# Altium PCB PCB1.PcbDoc
Units mil, origin at the board's own origin, x right, y up, seen from the top; angles counter-clockwise.
Board outline 3937.01 x 3937.01 mil, 2 copper layers (Top Layer, Bottom Layer); 288 components, 235 nets, 1002 pads, 0 vias.
Unrouted connection lines stored in the file: 724.
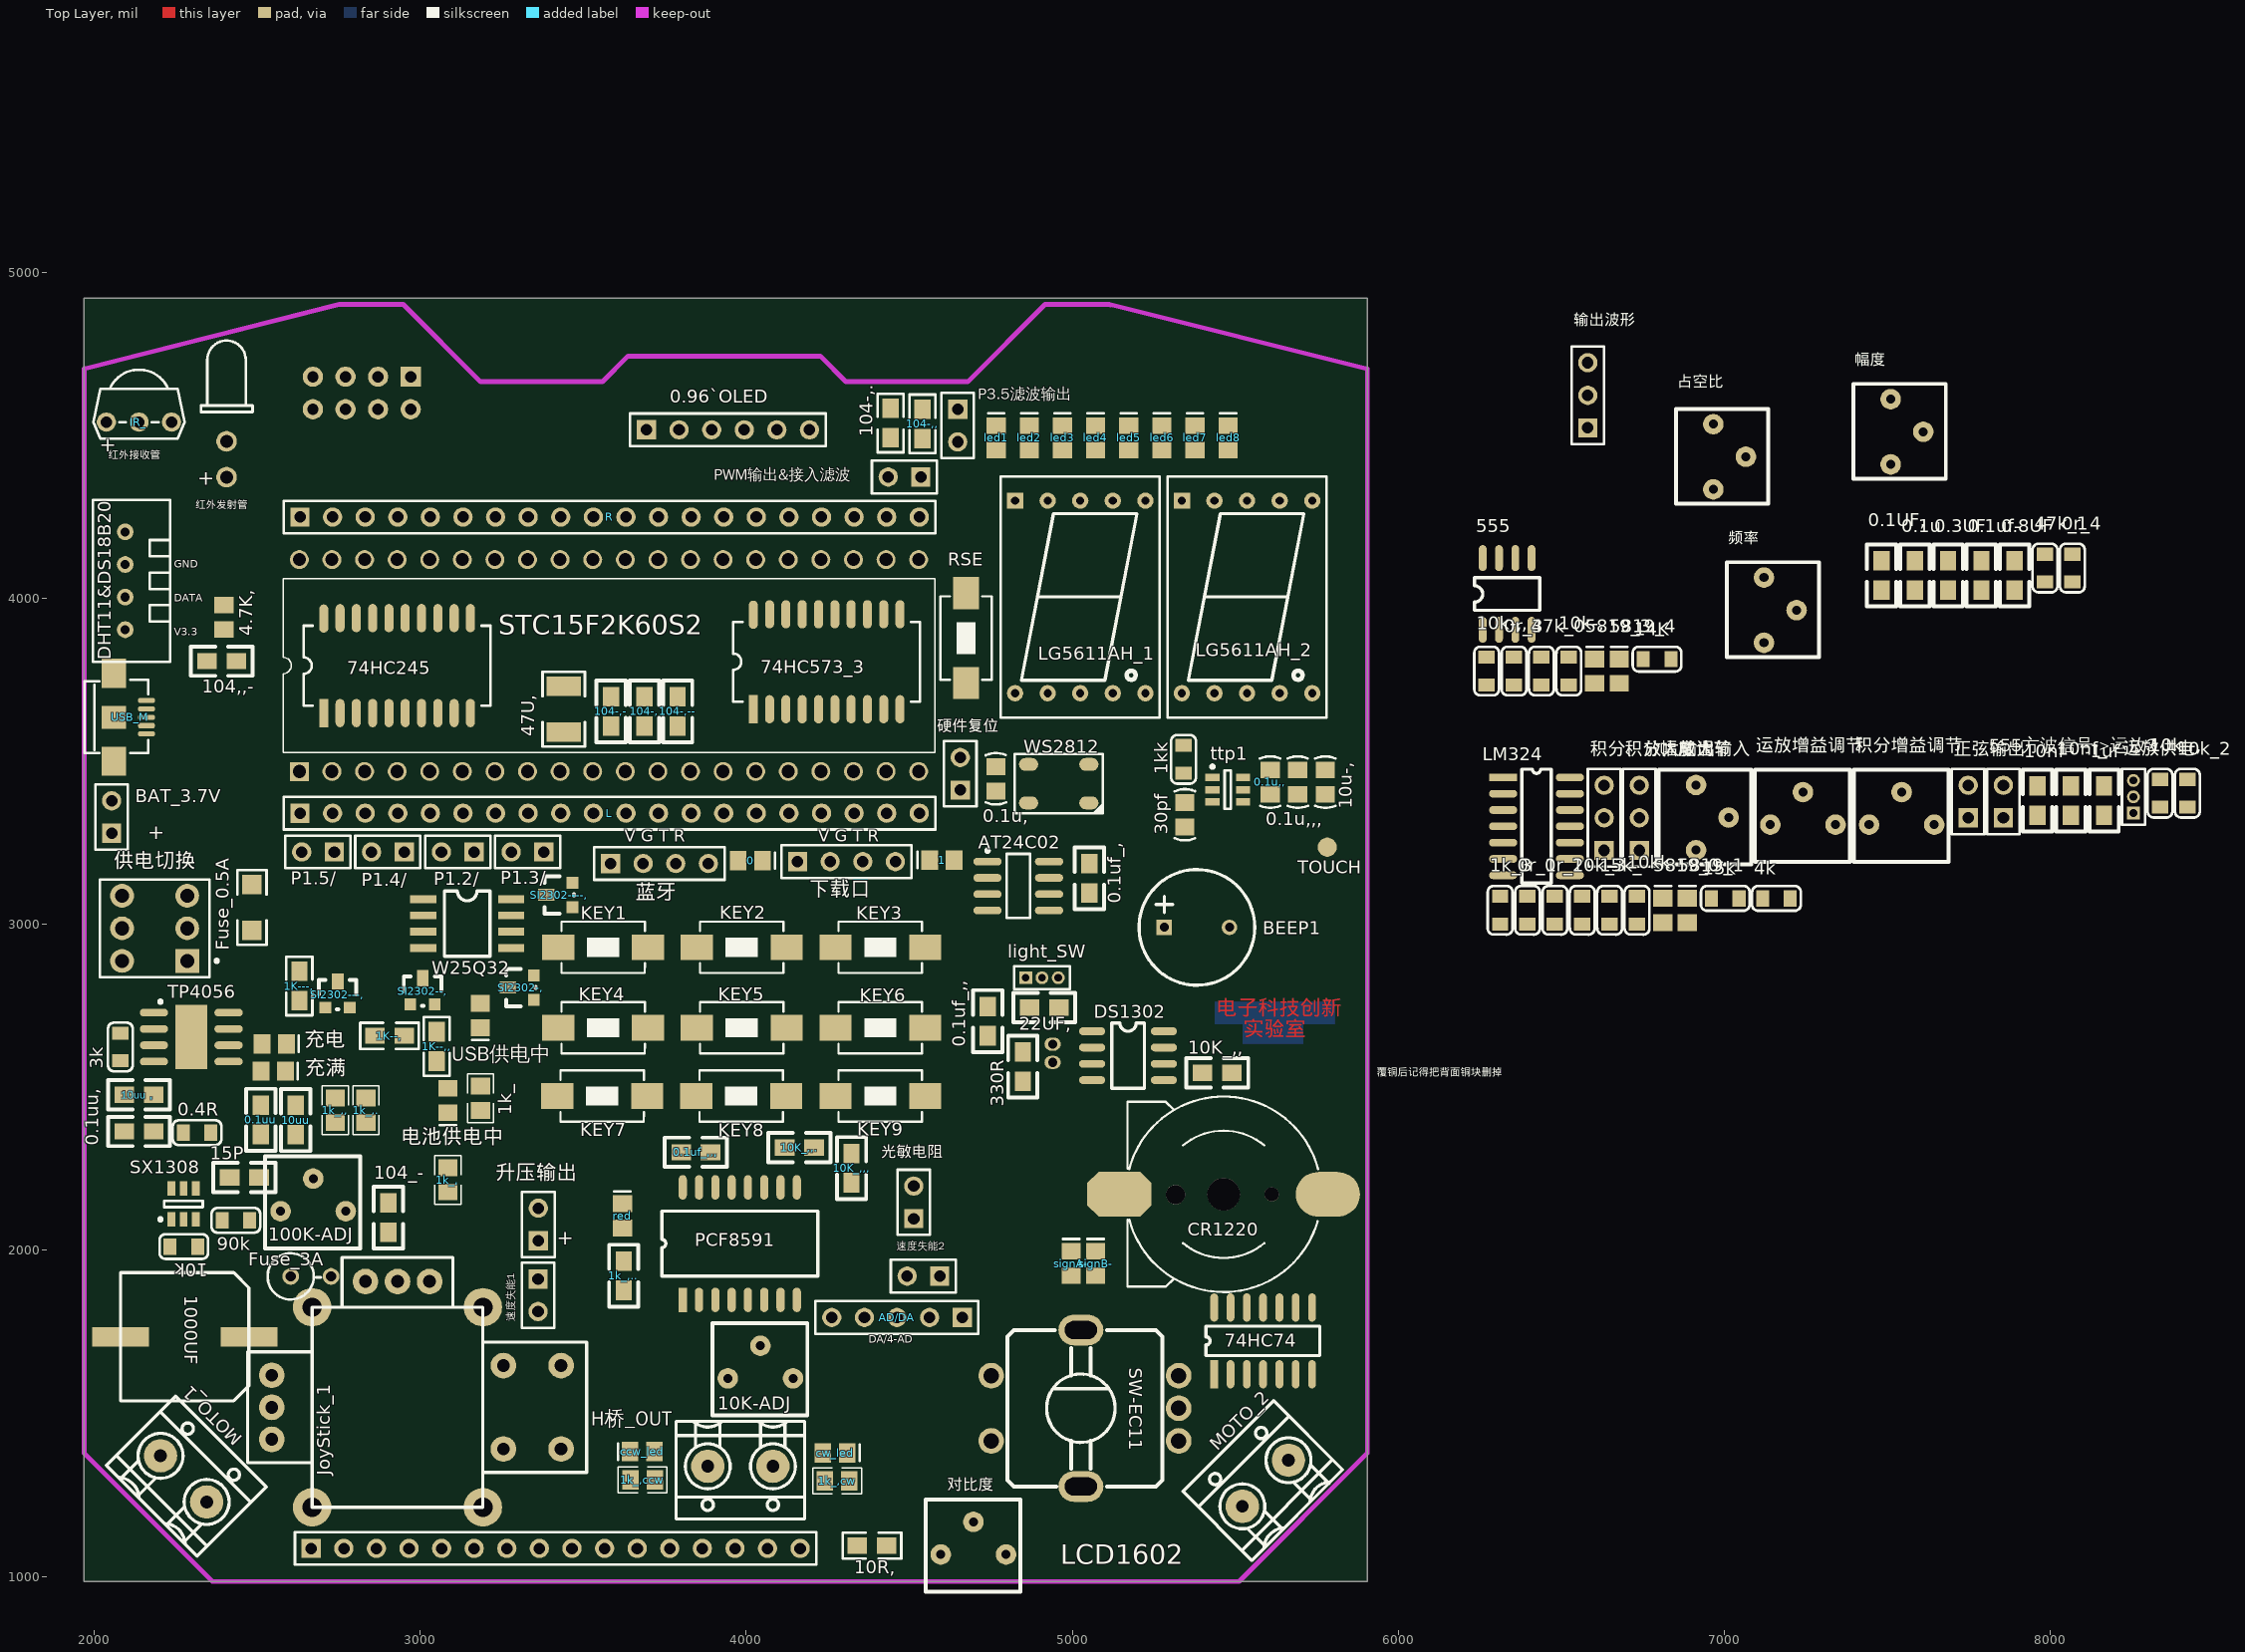
[diagram p0: Top Layer view]
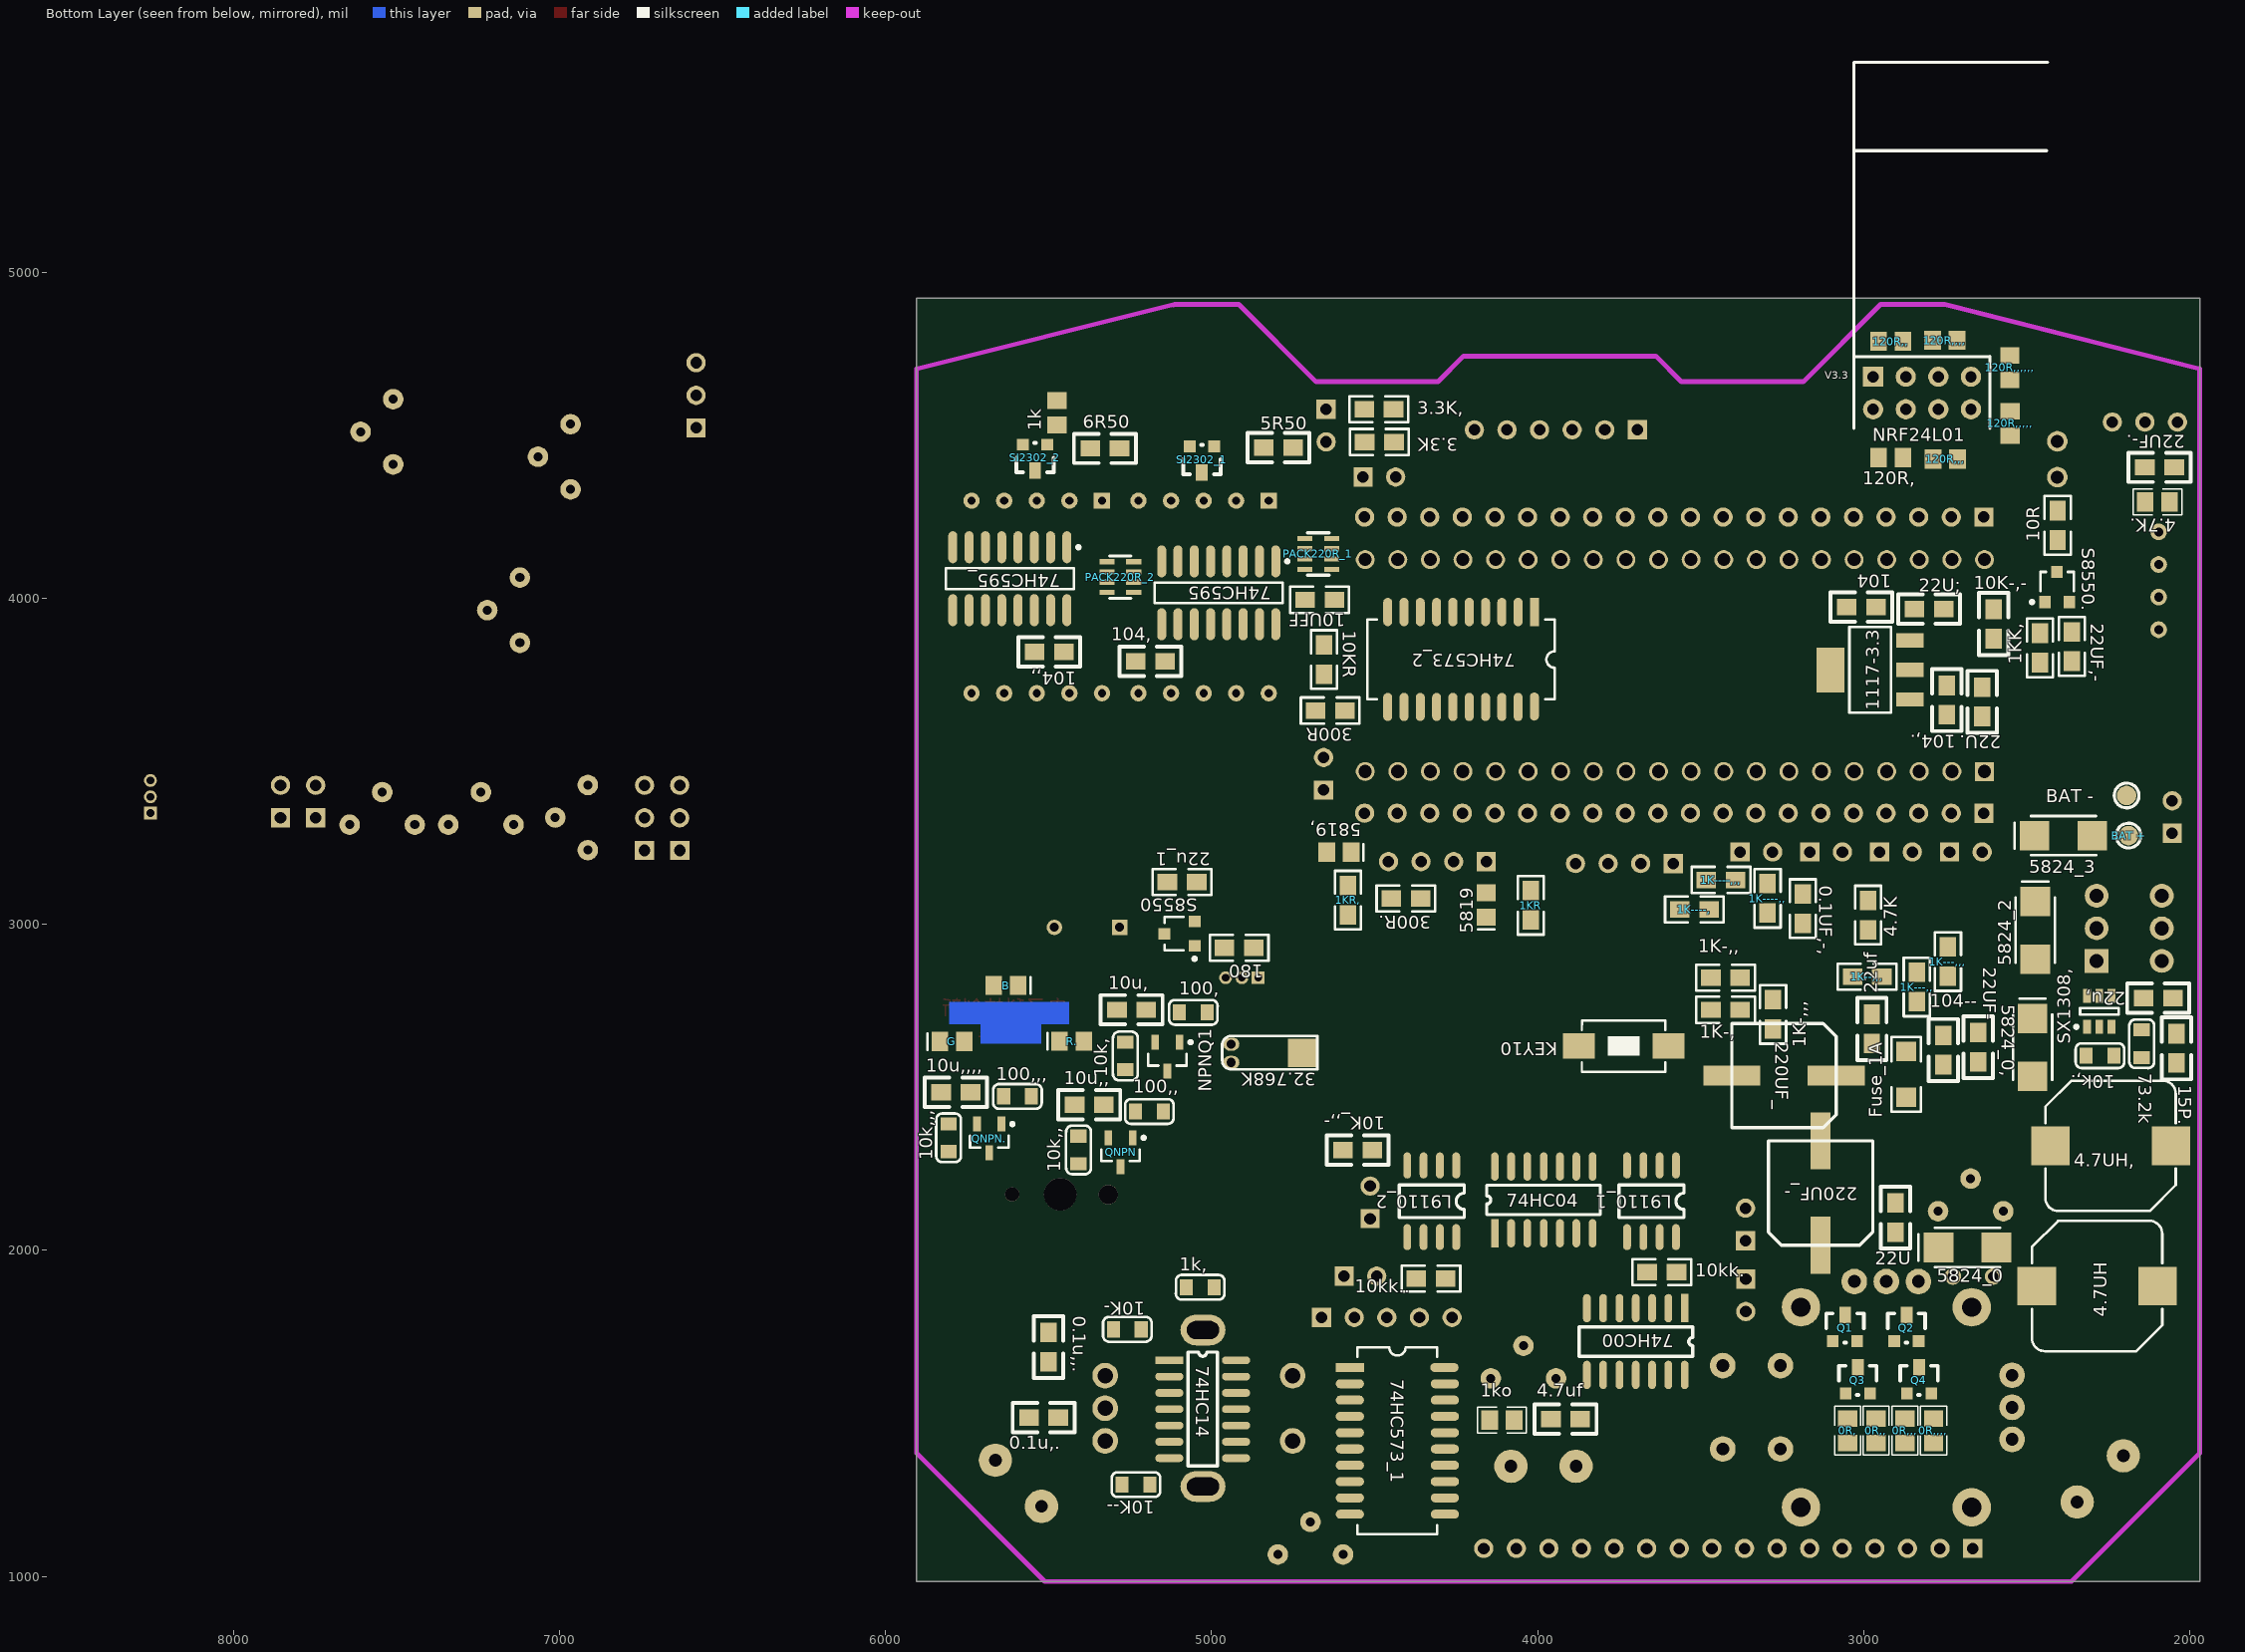
[diagram p1: Bottom Layer view, seen from below]

## Layer stack, top to bottom
Top Layer: signal copper 1.4
Dielectric: dielectric 12.6, FR-4, Dk 4.8
Bottom Layer: signal copper 1.4

## Board outline
1968.5,984.25 1968.5,4921.26 5905.51,4921.26 5905.51,984.25

## Design rules (kind name [scope] priority, off if disabled: settings)
Clearance [All] p1: gap=7
ComponentClearance [All] p1 off: gap=10 collisioncheckmode=3 verticalgap=10 showdistances=FALSE
PlaneClearance [All] p1: clearance=10
PlaneConnect [All] p1: planeconnectstyle=Direct reliefexpansion=20 reliefentries=4 reliefconductorwidth=10 reliefairgap=10
PolygonConnect [All] p1: connectstyle=Direct reliefconductorwidth=10 reliefentries=4 polygonreliefangle="90 Angle"
RoutingCorners [All] p1: cornerstyle=45-Degree minsetback=20 maxsetback=100
RoutingVias [All] p1: holewidth=12 width=15 viastyle="Through Hole" minholewidth=12 minwidth=15 maxholewidth=200 maxwidth=200
SilkscreenOverComponentPads [All] p1: minsilkscreentomaskgap=10
SolderMaskExpansion [All] p1: expansion=8
Width [All] p1: maxlimit=200 minlimit=10 preferedwidth=10
23 further rules are at their usual default settings.

## Components (designator, comment, footprint, x,y, rotation, side; value= is the part's Value field where it differs from the comment)
0 "LED0" LED_0805 4012.8,3195.87 r0 top
0.1u "Cap" 0805_C 7585.2,4026.09 r90 top
0.1u, "11" C-RAD-0805 4765.75,3446.85 r90 top
0.1u,, "11" C-RAD-0805 5607.28,3437.01 r270 top
0.1u,,, "11" C-RAD-0805 5691.93,3437.01 r270 top
0.1u,,. "Cap" 0805_C 5500,1658.46 r90 bottom
0.1u,. "Cap" 0805_C 5470.47,1487.2 r0 bottom
0.1UF, "Cap" 0805_C 7483.2,4026.09 r90 top
0.1UF,-, "" "0805 - duplicate" 3186.02,3093.5 r270 bottom
0.1uf- "Cap" 0805_C 7789.2,4026.09 r90 top
0.1uf_, "Cap" 0805_C 5053.15,3096.46 r90 top
0.1uf_,, "Cap" 0805_C 4741.14,2658.46 r90 top
0.1uf_,,, "Cap" 0805_C 3800.2,2301.18 r0 top
0.1uu "Cap" 0805_C 2510.83,2445.87 r270 top
0.1uu, "Cap" 0805_C 2182.09,2365.16 r180 top
0.3UF "Cap" 0805_C 7687.2,4026.09 r90 top
0.4R "Res2" "RES 0805_1" 2272.64,2361.22 r0 top
0.8UF "Cap" 0805_C 7891.2,4026.09 r90 top
0.96`OLED "S6" HDR1X6 3693.9,4517.72 r0 top
0R, "Res2" 0805-1 3049.21,1446.85 r270 bottom
0R,, "Res2" 0805-1 2961.17,1446.85 r270 bottom
0R,,, "Res2" 0805-1 2873.12,1446.85 r270 bottom
0R,,,, "Res2" 0805-1 2785.08,1446.85 r270 bottom
0r_1 "Res2" "RES 0805_1" 6396.67,3001.14 r90 top
0r_2 "Res2" "RES 0805_1" 6480.67,3001.14 r90 top
0r_3 "Res2" "RES 0805_1" 6355.33,3735.09 r90 top
0r_4 "Res2" "RES 0805_1" 8068.21,4051.09 r90 top
1 "LED0" LED_0805 4600.39,3197.83 r180 top
1k "Res1" 0805-2 5474.41,4569.88 r90 bottom
1k, "Res2" "RES 0805_1" 5077.76,1886.81 r180 bottom
1K-, "Res2" "0805 - duplicate" 3468.5,2738.19 r180 bottom
1K-,, "Res2" "0805 - duplicate" 3468.5,2836.61 r180 bottom
1K-,,, "Res2" "0805 - duplicate" 3277.56,2679.13 r90 bottom
1K--, "Res2" "0805 - duplicate" 2950.79,2658.46 r180 top
1K--,, "Res2" "0805 - duplicate" 3050.2,2580.71 r90 top
1K--,,, "Res2" "0805 - duplicate" 2943.9,2839.57 r0 bottom
1K---, "Res2" "0805 - duplicate" 2628.94,2856.3 r270 top
1K---,, "Res2" "0805 - duplicate" 2836.61,2853.35 r270 bottom
1K---,,, "Res2" "0805 - duplicate" 2741.14,2931.1 r270 bottom
1K----, "Res2" "0805 - duplicate" 3563.98,3046.26 r180 bottom
1K----,, "Res2" "0805 - duplicate" 3294.29,3035.43 r90 bottom
1K----,,, "Res2" "0805 - duplicate" 3482.28,3136.81 r180 bottom
1k_ "Res2" 0805-1 3185.04,2466.54 r90 top
1k_3 "Res2" "RES 0805_1" 6312.67,3001.14 r90 top
1k_, "Res2" 0805-1 3084.65,2216.54 r90 top
1k_,, "Res2" 0805-1 2739.17,2430.12 r90 top
1k_,. "Res2" 0805-1 2833.66,2430.12 r90 top
1k_,.. "R2" 0805 3624.02,1967.52 r270 top
1k_,ccw "Res2" 0805-1 3682.09,1296.26 r180 top
1k_,cw "Res2" 0805-1 4278.61,1293.31 r0 top
1kk "Res2" "RES 0805_1" 5341.54,3549.21 r270 top
1KK, "Res2" "0805 - duplicate" 2458.66,3893.7 r270 bottom
1ko "Res2" 0805-1 4109.25,1479.33 r180 bottom
1KR "Res2" "0805 - duplicate" 4020.67,3013.78 r90 bottom
1KR, "Res2" "0805 - duplicate" 4581.69,3029.53 r90 bottom
1uf "Cap" 0805_C 8165.5,3335.14 r90 top
3.3K "Res2" "0805 - duplicate" 4530.51,4480.31 r180 bottom
3.3K, "Res2" "0805 - duplicate" 4441.93,4580.71 r0 bottom
3k "Res2" "RES 0805_1" 2079.72,2581.69 r90 top
4.7K "Res2" "0805 - duplicate" 2986.22,3073.82 r270 bottom
4.7K, "Res1" 0805-2 2397.64,3942.91 r270 top
4.7K. "Res2" 0805-1 2098.43,4296.26 r180 bottom
4.7uf "Cap" 0805_C 3869.09,1482.28 r0 bottom
4.7UH "Inductor" L-SMD-10 2283.46,1890.75 r0 bottom
4.7UH, "Inductor" L-SMD-10 2242.13,2320.87 r180 bottom
4k "Res2" "RES 0805_1" 7117.99,3080.14 r0 top
5R50 "R2" 0805 4750,4463.58 r0 bottom
6R50 "R2" 0805 5282.48,4460.63 r0 bottom
10k "Res2" "RES 0805_1" 2316.93,2011.81 r180 top
10k, "Res2" "RES 0805_1" 5264.76,2554.13 r90 bottom
10k,, "Res2" "RES 0805_1" 5408.46,2265.75 r90 bottom
10k,,, "Res2" "RES 0805_1" 5807.09,2303.15 r90 bottom
10k,. "Res2" "RES 0805_1" 2232.28,2597.44 r0 bottom
10K- "Res2" "RES 0805_1" 5301.18,1757.87 r180 bottom
10k-, "Res2" "RES 0805_1" 6523.33,3735.09 r90 top
10k-,, "Res2" "RES 0805_1" 6271.33,3735.09 r90 top
10K-,- "R2" 0805 2601.38,3876.97 r90 bottom
10K-- "Res2" "RES 0805_1" 5274.61,1281.5 r180 bottom
10k--, "Res2" "RES 0805_1" 8337.24,3360.14 r90 top
10K-ADJ "MHDR1X3" pot（正方形） 4101.38,1532.48 r90 top
10k_2 "Res2" "RES 0805_1" 8421.24,3360.14 r90 top
10k_3 "Res2" "RES 0805_1" 6564.67,3001.14 r90 top
10K_,, "R2" 0805 5490.16,2545.28 r180 top
10K_,,, "R2" 0805 4322.83,2207.68 r90 top
10K_,,- "R2" 0805 4597.44,2308.07 r180 bottom
10K_,,. "R2" 0805 4118.11,2315.94 r0 top
10kk, "Res2" "RES 0805_1" 6732.67,3001.14 r90 top
10kk. "Res2" "0805 - duplicate" 3573.82,1933.07 r0 bottom
10kk.. "Res2" "0805 - duplicate" 4372.05,1913.39 r180 bottom
10KR "Res2" "0805 - duplicate" 4655.51,3767.72 r90 bottom
10nf "Cap" 0805_C 7961.5,3335.14 r90 top
10nf_ "Cap" 0805_C 8063.5,3335.14 r90 top
10R "Res2" "0805 - duplicate" 2404.53,4269.69 r270 bottom
10R, "Res2" "0805 - duplicate" 4340.55,1094.49 r0 top
10u, "Cap" 0805_C 5290.35,2738.19 r180 bottom
10u,, "Cap" 0805_C 5420.28,2446.85 r180 bottom
10u,,,, "Cap" 0805_C 5829.72,2485.24 r180 bottom
10u-, "11" C-RAD-0805 5776.57,3437.01 r270 top
10UFF "" "0805 - duplicate" 4713.58,3996.06 r180 bottom
10uu "Cap" 0805_C 2618.11,2444.88 r270 top
10uu， "Cap" 0805_C 2182.09,2477.36 r180 top
14K "Res2" "RES 0805_1" 6751.55,3814.09 r0 top
15k "Res2" "RES 0805_1" 6960.89,3080.14 r0 top
15k_ "Res2" "RES 0805_1" 6648.67,3001.14 r90 top
15P "Cap" 0805_C 2415.35,2223.43 r0 top
15P. "Cap" 0805_C 2040.35,2574.8 r90 bottom
22U "Cap" 0805_C 2901.57,2145.67 r270 bottom
22u, "Cap" 0805_C 2051.18,2773.62 r0 bottom
22U. "Cap Pol1" 0805 2635.83,3728.35 r270 bottom
22U; "Cap Pol1" 0805 2843.5,3967.52 r180 bottom
22u_1 "" "0805 - duplicate" 5135.83,3129.92 r180 bottom
22uf "Cap" 0805_C 2974.41,2724.41 r270 bottom
22UF, "Cap" 0805_C 4869.09,2745.08 r0 top
22UF,- "" "0805 - duplicate" 2361.22,3808.07 r90 bottom
22UF- "Cap" 0805_C 2648.62,2578.74 r90 bottom
22UF-. "Cap" 0805_C 2136.81,4402.56 r180 bottom
30pf "Cap" C-RAD-0805 5345.47,3336.61 r90 top
32.768K "32.768K" XTAL32 4939.96,2632.87 r180 bottom
47k_0 "Res2" "RES 0805_1" 6439.33,3735.09 r90 top
47k_1 "Res2" "RES 0805_1" 7984.2,4051.09 r90 top
47U, "Cap Pol1" 1210 3439.96,3660.43 r90 top
73.2k "Res2" "RES 0805_1" 2146.65,2591.54 r90 bottom
74HC00 "74HC00" SOP-14P 3698.82,1720.47 r270 bottom
74HC04 "74HC04" SOP-14P 3981.3,2155 r90 bottom
74HC14 "74HC14" SOP-14P 5027.56,1512.8 r180 bottom
74HC74 "74HC74" SOP-14P 5585.63,1722.44 r90 top
74HC245 "74HC245" SOP20 2703.74,3648.62 r90 top
74HC573_1 "74HC573" SOP20 4575.79,1640.75 r180 bottom
74HC573_2 "74HC573" SOP20 4009.84,3958.66 r270 bottom
74HC573_3 "74HC573" SOP20 4021.65,3660.43 r90 top
74HC595 "74HC595" NSO16_M 4978.35,4017.72 r270 bottom
74HC595_ "74HC595" NSO16_M 5619.09,4061.02 r270 bottom
90k "Res2" "RES 0805_1" 2391.73,2092.52 r0 top
100, "Res2" "RES 0805_1" 5013.78,2730.31 r0 bottom
100,, "Res2" "RES 0805_1" 5148.62,2426.18 r0 bottom
100,,, "Res2" "RES 0805_1" 5553.15,2472.44 r0 bottom
100K-ADJ "MHDR1X3" pot（正方形） 2729.33,2045.28 r90 top
104 "104" 0805 2961.61,3973.43 r0 bottom
104, "Cap" 0805_C 5233.27,3807.09 r180 bottom
104,, "Cap" 0805_C 5543.31,3836.61 r180 bottom
104,,- "Cap" 0805_C 2436.02,3808.07 r180 top
104,. "105" 0805 2744.09,3733.27 r270 bottom
104-, "104" 0805 3687.45,3608.76 r90 top
104-,, "" "0805 - duplicate" 4540.35,4580.71 r270 top
104-,- "104" 0805 3585.45,3608.76 r90 top
104-,-- "104" 0805 3789.45,3608.76 r90 top
104-,. "" "0805 - duplicate" 4442.91,4583.66 r270 top
104-- "Cap" 0805_C 2754.92,2569.88 r90 bottom
104_- "Cap" 0805_C 2901.57,2145.67 r270 top
120R, "Res1" 0805-2 2916.34,4432.09 r0 bottom
120R,, "Res1" 0805-2 2916.34,4789.37 r0 bottom
120R,,, "Res1" 0805-2 2749.02,4428.15 r0 bottom
120R,,,, "Res1" 0805-2 2750.98,4792.32 r0 bottom
120R,,,,, "Res1" 0805-2 2550.2,4537.4 r270 bottom
120R,,,,,, "Res1" 0805-2 2551.18,4708.66 r270 bottom
180 "Res2" "0805 - duplicate" 4960.63,2928.15 r180 bottom
220UF_ "Cap Pol1" capso_8*10 3244.09,2536.42 r180 bottom
220UF_- "Cap Pol1" capso_8*10 3131.89,2176.18 r270 bottom
300R "Res2" "0805 - duplicate" 4681.1,3656.5 r180 bottom
300R. "Res2" "0805 - duplicate" 4448.82,3079.72 r180 bottom
330R "R2" 0805 4848.43,2518.7 r90 top
555 "Header 4X2A" SOP8 6334.33,4019.09 r90 top
555方波信号->运放3 "Header 2" HDR1X2 7856.57,3327.2 r90 top
1000UF "Cap Pol1" CAPSO_10*10 2277.56,1735.24 r0 top
1117-3.3 "LM1117" SOT223 2976.38,3801.18 r90 bottom
5819 "1N5819" LED_0805 4157.48,3060.04 r270 bottom
5819, "1N5819" LED_0805 4609.25,3221.46 r180 bottom
5819_0 "1N5819" LED_0805 6812.2,3043.2 r90 top
5819_1 "1N5819" LED_0805 6887.25,3043.2 r90 top
5819_3 "1N5819" LED_0805 6602.86,3777.15 r90 top
5819_4 "1N5819" LED_0805 6677.91,3777.15 r90 top
5824_0 "1N5819" DIODE-SMA 2681.1,2008.86 r0 bottom
5824_0, "1N5819" DIODE-SMA 2481.3,2623.03 r90 bottom
5824_2 "1N5819" DIODE-SMA 2473.43,2982.28 r90 bottom
5824_3 "1N5819" DIODE-SMA 2386.81,3272.64 r0 bottom
AD/DA "Header 5" HDR1X5 4662.4,1794.29 r180 top
AT24C02 "AT24C02" SOIC8_N 4834.65,3118.11 r0 top
B "LED0" LED_0805 5630.91,2812.99 r180 bottom
"BAT +" "CON1" TP6 2187.01,3272.64 r180 bottom
"BAT -" "CON1" TP6 2192.91,3395.67 r180 bottom
BAT_3.7V "Header 2" HDR2X1_A 2053.15,3279.53 r90 top
BEEP1 "BEEP" BELL-5 5282.48,2991.14 r0 top
ccw_led "LED0" LED_0805 3681.1,1382.87 r180 top
CR1220 "Battery" CR1220 5464.57,2172.24 r270 top
cw_led "LED0" LED_0805 4272.64,1378.94 r0 top
DHT11&DS18B20 "DHT11&DS18B20" DHT11 2094.49,3904.53 r90 top
DS1302 "Header 4X2A" SOP8 5176.18,2597.44 r0 top
Fuse_0.5A "Fuse" 1206 2483.27,3052.17 r90 top
Fuse_1A "Fuse" 1206 2869.09,2540.35 r270 bottom
Fuse_3A "Fuse" FUSE_V 2602.36,1920.28 r0 top
G "LED0" LED_0805 5796.26,2640.75 r0 bottom
H桥_OUT "Header 2" ED120/2DS_1 3881.89,1337.6 r0 top
IR_ "Header 3" HS0038B 2136.81,4541.34 r180 top
JoyStick_1 "JoyStick" JoyStick 2930.12,1518.7 r90 top
KEY1 "SW-PB" SW_PB2_A1 3562.99,2930.12 r90 top
KEY2 "SW-PB" SW_PB2_A1 3988.19,2930.12 r90 top
KEY3 "SW-PB" SW_PB2_A1 4413.39,2930.12 r90 top
KEY4 "SW-PB" SW_PB2_A1 3562.99,2683.07 r90 top
KEY5 "SW-PB" SW_PB2_A1 3988.19,2683.07 r90 top
KEY6 "SW-PB" SW_PB2_A1 4413.39,2683.07 r90 top
KEY7 "SW-PB" SW_PB2_A1 3560.04,2473.43 r90 top
KEY8 "SW-PB" SW_PB2_A1 3986.71,2473.43 r90 top
KEY9 "SW-PB" SW_PB2_A1 4413.39,2473.43 r90 top
KEY10 "SW-PB" SW_PB2_A1 3738.19,2626.97 r270 bottom
L "dp20" HDR1X20 2630.87,3341.54 r0 top
L9110_1 "Header 4X2A" SOP8 3650.59,2145.67 r270 bottom
L9110_2 "Header 4X2A" SOP8 4324.8,2145.67 r270 bottom
LCD1602 "1602" LCD1602A 2665.35,1085.63 r0 top
led1 "LED0" LED_0805 4766.73,4493.11 r90 top
led2 "LED0" LED_0805 4868.39,4493.11 r90 top
led3 "LED0" LED_0805 4970.05,4493.11 r90 top
led4 "LED0" LED_0805 5071.71,4493.11 r90 top
led5 "LED0" LED_0805 5173.37,4493.11 r90 top
led6 "LED0" LED_0805 5275.03,4493.11 r90 top
led7 "LED0" LED_0805 5376.69,4493.11 r90 top
led8 "LED0" LED_0805 5478.35,4493.11 r90 top
LG5611AH_1 "LG5611AH" LG5611AH 5024.61,4004.92 r0 top
LG5611AH_2 "LG5611AH" LG5611AH 5536.42,4004.92 r0 top
light_SW "MHDR1X3" MHDR1X3 4857.28,2836.61 r0 top
LM324 "LM324QID/PW" SOP-14P 6424.34,3301.14 r0 top
MOTO_1 "Header 2" ED120/2DS_1 2344.49,1228.35 r135 top
MOTO_2 "Header 2" ED120/2DS_1 5663.39,1356.3 r225 top
NPNQ1 "QNPN" SOT-23B_N 5135.83,2594.49 r270 bottom
NRF24L01 "NRF24L01" NRF24L01 2970.47,4580.71 r270 bottom
P1.2/ "Header 2" HDR2X1_A 3164.7,3222.44 r180 top
P1.3/ "Header 2" HDR2X1_A 3378.94,3222.44 r180 top
P1.4/ "Header 2" HDR2X1_A 2950.46,3222.44 r180 top
P1.5/ "Header 2" HDR2X1_A 2736.22,3222.44 r180 top
P3.5滤波输出 "Header 2" HDR2X1_A 4648.62,4580.71 r270 top
PACK220R_1 "RESPACK4" RESPACK4_SMD 4713.58,4184.06 r270 bottom
PACK220R_2 "RESPACK4" RESPACK4_SMD 5239.17,4018.7 r90 bottom
PCF8591 "Header 8X2A" SOP16-50-208 3805.12,1848.43 r90 top
PWM输出&接入滤波 "Header 2" HDR2X1_A 4535.43,4373.03 r180 top
Q1 "LR7843" SOT-23N 3094.49,1721.46 r180 bottom
Q2 "LR7843" SOT-23N 2905.51,1721.46 r180 bottom
Q3 "LR7843" SOT-23N 3055.12,1561.02 r180 bottom
Q4 "LR7843" SOT-23N 2867.13,1561.02 r180 bottom
QNPN "QNPN" SOT-23B_N 5279.53,2301.18 r270 bottom
QNPN. "QNPN" SOT-23B_N 5682.09,2343.5 r270 bottom
R "dp20" HDR1X20 2630.87,4250 r0 top
R. "LED0" LED_0805 5429.13,2641.73 r0 bottom
red "LED0" LED_0805 3620.08,2106.3 r90 top
RSE "SW-PB" SW_PB2_A1 4674.21,3880.91 r180 top
S8550 "S8550" SOT-23R 5093.5,2971.46 r90 bottom
S8550. "S8550" SOT-23R 2406.5,4030.51 r180 bottom
SI2302-, "LR7843" SOT-23N 3348.43,2768.7 r90 top
SI2302--, "LR7843" SOT-23N 2969.49,2754.92 r0 top
SI2302---, "LR7843" SOT-23N 2708.66,2745.08 r0 top
SI2302----, "LR7843" SOT-23N 3466.54,3053.15 r90 top
SI2302_1 "LR7843" SOT-23N 4992.13,4466.54 r0 bottom
SI2302_2 "LR7843" SOT-23N 5503.94,4472.44 r0 bottom
signA- "LED0" LED_0805 4996.67,1959.93 r90 top
signB- "LED0" LED_0805 5071.72,1959.93 r90 top
STC15F2K60S2 "STC15F2K60S2_PDIP40" DIP40 2628.94,3469.49 r90 top
SW-EC11 "SW-EC11" EC11 5026.57,1515.75 r90 top
SX1308 "Header 3X2A" SOT23-6 2273.62,2142.72 r90 top
SX1308, "Header 3X2A" SOT23-6 2276.57,2733.27 r90 bottom
TOUCH "CON1" TP-1.5 5782.48,3237.2 r0 top
TP4056 "TP4056" NSO8_TP4056 2297.24,2654.53 r0 top
ttp1 "TTP223" SOT23-6 5477.36,3413.39 r0 top
USB_M "USB_M" USB_MICRO 2060.04,3635.83 r270 top
USB供电中 "LED0" LED_0805 3184.06,2720.47 r270 top
W25Q32 "W25Q32" SOIC-8 3008.86,3077.76 r0 top
WS2812 "2812" WS2812 5259.84,3294.29 r0 top
下载口 "Header 4" HDR1X4 4157.48,3192.91 r0 top
供电切换 "SW-DPDT" SWITCH_B1 2185.04,2988.19 r180 top
充满 "绿灯" LED_0805 2549.21,2550.2 r0 top
充电 "红灯" LED_0805 2552.17,2633.86 r0 top
光敏电阻 "Header 2" HDR2X1_A 4513.78,2097.44 r90 top
升压输出 "Header 2" HDR1X2 3362.2,2029.53 r90 top
占空比 "100k adj" pot（正方形） 6891.73,4376.97 r0 top
对比度 "10k adj" pot（正方形） 4754.92,992.13 r90 top
幅度 "100k adj" pot（正方形） 7436.02,4453.74 r0 top
幅度调节 "20k" pot（正方形） 6838.76,3270.14 r0 top
正弦输出 "Header 2" HDR1X2 7748.69,3327.2 r90 top
电池供电中 "LED0" LED_0805 3084.65,2459.65 r270 top
硬件复位 "Header 2" HDR2X1_A 4656.5,3412.4 r90 top
积分、放大输入 "Header 3" HDR1X3 6739.82,3227.2 r90 top
积分、放大输出 "Header 3" HDR1X3 6631.94,3227.2 r90 top
积分增益调节 "10k adj" pot（正方形） 7602.76,3231.14 r90 top
红外发射管 "LED0" LED_A1 2405.51,4482.28 r0 top
蓝牙 "Header 4" HDR1X4 3583.66,3187.01 r0 top
输出波形 "Header 3" HDR1X3 6581.69,4523.62 r90 top
运放供电 "MHDR1X3" MHDR1X3 8255.87,3341.77 r90 top
运放增益调节 "1M" pot（正方形） 7299.76,3231.14 r90 top
速度失能1 "Header 2" HDR2X1_A 3361.22,1912.4 r270 top
速度失能2 "Header 2" HDR2X1_A 4593.5,1921.26 r180 top
频率 "100k adj" pot（正方形） 7047.24,3906.5 r0 top

## Footprints (in the part's own frame and the unit in brackets; to place one, negate y for a bottom-side part, rotate by r counter-clockwise, add the part's x,y. Pads: shape width x height; smd on the part's side, far side on the other; paste and mask are expansions set on the pad)
0805 [mil]
  rect 60x50 smd: 1(0,0) 2(90,0)
  silkscreen extent -50,-45 140,45
"0805 - duplicate" [mil]
  rect 60x50 smd: 1(0,0) 2(90,0)
  silkscreen extent -45,-40 135,40
0805-1 [mm] "贴片"
  rect 1.3x1.5 smd: 1(-0.95,0) 2(0.95,0)
  silkscreen extent -1.91,-1.02 1.91,1.02, body extent -1.14,-0.51 1.14,0.51, height 1
0805-2 [mm]
  rect 1.3x1.5 smd: 1(-0.95,0) 2(0.95,0)
0805_C [mil]
  rect 60x50 smd: 1(0,0) 2(90,0)
  silkscreen extent -50,-45 140,45, body extent 6,-25 84,25, height 31
1206 [mil]
  rect 60x60 smd: 1(-70,0) 2(70,0)
  silkscreen extent -115,-45 115,45, body extent -75,-35 75,35, height 39
1210 [mil] "贴片"
  rect 60x106.3 smd: 1(-70,0) 2(70,0)
  silkscreen extent -115,-65 115,65, body extent -65,-50 65,50, height 39
BELL-5 [mm]
  rect 1.2x1.2 hole 0.7: 1(0,0)
  round 1.2 hole 0.7: 2(5.08,0)
  silkscreen extent -1.97,-4.51 7.05,4.51
C-RAD-0805 [mm] "贴片"
  rect 1.3x1.5 smd: 1(-0.95,0) 2(0.95,0)
  silkscreen extent -2,-0.79 2,0.79, body extent -1.27,-0.64 1.27,0.64, height 0.9
capso_8*10 [mil]
  rect 175x60 smd: 1(160,0) 2(-160,0)
  silkscreen extent -160,-160 160,160, body extent -192,-162 198,164, height 402
CAPSO_10*10 [mil]
  rect 175x60 smd: 1(196.85,0) 2(-196.85,0)
  silkscreen extent -197,-197 197,197, body extent -227,-206 229,200, height 402
CR1220 [mm] "钮扣"
  round 1.1 hole 1.1: 0(0,3.75)
  round 2.54 hole 2.54: 0(0,0)
  round 1.5 hole 1.5: 0(0.025,-3.75)
  oct 3.5x5 smd: 1(0,-8.128)
  oval 3.5x5 smd: 2(0,8.128)
  silkscreen extent -7.62,-7.5 7.62,7.36
DHT11 [mm]
  round 1.3 hole 0.7: 1(0,0) 2(2.54,0) 3(5.08,0) 4(7.62,0)
  silkscreen extent -2.5,-3.5 10.12,2.5
DIODE-SMA [mm] "贴片"
  rect 2.3x2.3 smd: 1(-2.25,0) 2(2.25,0)
  silkscreen extent -2.54,-1.52 3.81,1.52, body extent -2.92,-1.4 2.92,1.4, height 3
DIP40 [mil]
  rect 58x58 hole 40: 1(0,0)
  round 58 hole 40: 2(0,-100) 3(0,-200) 4(0,-300) 5(0,-400) 6(0,-500) 7(0,-600) 8(0,-700) 9(0,-800) 10(0,-900) 11(0,-1000) 12(0,-1100) 13(0,-1200) 14(0,-1300) 15(0,-1400) 16(0,-1500) 17(0,-1600) 18(0,-1700) 19(0,-1800) 20(0,-1900) 21(650,-1900) 22(650,-1800) 23(650,-1700) 24(650,-1600) 25(650,-1500) 26(650,-1400) 27(650,-1300) 28(650,-1200) 29(650,-1100) 30(650,-1000) 31(650,-900) 32(650,-800) 33(650,-700) 34(650,-600) 35(650,-500) 36(650,-400) 37(650,-300) 38(650,-200) 39(650,-100) 40(650,0)
  silkscreen extent 58,-1950 592,50
EC11 [mm]
  round 2 hole 1.2: 1(-2.54,-7.62) 2(0,-7.62) 3(2.54,-7.62) 4(2.54,6.985) 5(-2.54,6.985)
  oval 2.4x3.5 hole 1.4 slot 2.5 at 90 deg: 6(-6.096,0) 7(6.096,0)
  silkscreen extent -6.1,-6.35 6.1,5.71
ED120/2DS_1 [mm]
  round 2.6 hole 1: 1(0,0) 2(5.08,0)
  silkscreen extent -2.46,-4.1 7.54,3.5
FUSE_V [mm]
  round 1.3 hole 0.8: 1(0,0) 2(3.14,0)
  silkscreen extent -1.8,-1.8 2.34,1.8
HDR1X2 [mm] "Connector; Header;"
  rect 1.5x1.5 hole 0.9: 1(0,0)
  round 1.5 hole 0.9: 2(2.54,0)
  silkscreen extent -1.27,-1.27 3.81,1.27
HDR1X3 [mm] "Connector; Header"
  rect 1.5x1.5 hole 0.9: 1(0,0)
  round 1.5 hole 0.9: 2(2.54,0) 3(5.08,0)
  silkscreen extent -1.27,-1.27 6.35,1.27
HDR1X4 [mm] "Connector; Header; 4 Posi"
  rect 1.5x1.5 hole 0.9: 1(0,0)
  round 1.5 hole 0.9: 2(2.54,0) 3(5.08,0) 4(7.62,0)
  silkscreen extent -1.27,-1.27 8.89,1.27
HDR1X5 [mm] "Connector; Header; 5 Position"
  rect 1.5x1.5 hole 0.9: 1(0,0)
  round 1.5 hole 0.9: 2(2.54,0) 3(5.08,0) 4(7.62,0) 5(10.16,0)
  silkscreen extent -1.27,-1.27 11.43,1.27
HDR1X6 [mm] "Connector; Header; 6 Position"
  rect 1.5x1.5 hole 0.9: 1(0,0)
  round 1.5 hole 0.9: 2(2.54,0) 3(5.08,0) 4(7.62,0) 5(10.16,0) 6(12.7,0)
  silkscreen extent -1.27,-1.27 13.97,1.27
HDR1X20 [mm] "Connector; Header; 20 Position"
  rect 1.5x1.5 hole 0.9: 1(0,0)
  round 1.5 hole 0.9: 2(2.54,0) 3(5.08,0) 4(7.62,0) 5(10.16,0) 6(12.7,0) 7(15.24,0) 8(17.78,0) 9(20.32,0) 10(22.86,0) 11(25.4,0) 12(27.94,0) 13(30.48,0) 14(33.02,0) 15(35.56,0) 16(38.1,0) 17(40.64,0) 18(43.18,0) 19(45.72,0) 20(48.26,0)
  silkscreen extent -1.27,-1.27 49.53,1.27
HDR2X1_A [mm] "Connector; Header; 2 Posi"
  rect 1.5x1.5 hole 0.9: 1(0,0)
  round 1.5 hole 0.9: 2(2.54,0)
  silkscreen extent -1.27,-1.27 3.81,1.27
HS0038B [mm] "红外"
  round 1.5 hole 0.9: 1(-2.54,0) 2(0,0) 3(2.54,0)
  silkscreen extent -3.56,-4.08 3.56,1.3
JoyStick [mm]
  round 2 hole 1: 1(-2.5,9.8) 2(0,9.8) 3(2.5,9.8) 4(9.8,2.5) 5(9.8,0) 6(9.8,-2.5) 7(-3.25,-8.25) 8(3.25,-8.25) 9(-3.25,-12.75) 10(3.25,-12.75)
  round 3 hole 1.5: 11(-7.8,6.65) 12(7.8,6.65) 13(-7.8,-6.65) 14(7.8,-6.65)
  silkscreen extent -7.8,-14.73 11.68,11.68
L-SMD-10 [mm] "贴Æ"
  rect 3x3 smd: 1(-4.699,0) 2(4.699,0)
  silkscreen extent -5.08,-5.08 5.08,5.08, body extent -5.08,-5.08 5.08,5.08, height 4
LCD1602A [mm]
  rect 1.5x1.5 hole 0.9: 1(0,0)
  round 1.5 hole 0.9: 2(2.54,0) 3(5.08,0) 4(7.62,0) 5(10.16,0) 6(12.7,0) 7(15.24,0) 8(17.78,0) 9(20.32,0) 10(22.86,0) 11(25.4,0) 12(27.94,0) 13(30.48,0) 14(33.02,0) 15(35.56,0) 16(38.1,0)
  silkscreen extent -1.27,-1.27 39.37,1.27, body extent -8,-34.5 72.5,2, height 21.34
LED_0805 [mm]
  rect 1.3x1.5 smd: 1(-0.95,0) 2(0.95,0)
  silkscreen extent 1.91,-0.64 1.91,0.64
LED_A1 [mm]
  round 1.6 hole 1: 1(0,-2.794) 2(0,0)
  silkscreen extent -1.98,2.29 2.03,7.85
LG5611AH [mm]
  rect 1.27x1.27 hole 0.635: 1(-5.08,7.5)
  round 1.27 hole 0.635: 2(-2.54,7.5) 3(0,7.5) 4(2.54,7.5) 5(5.08,7.5) 6(5.08,-7.5) 7(2.54,-7.5) 8(0,-7.5) 9(-2.54,-7.5) 10(-5.08,-7.5)
  silkscreen extent -6.2,-9.4 6.2,9.4
MHDR1X3 [mm] "Connector; Header; 3 Position"
  rect 1x1 hole 0.6: 1(0,0)
  round 1 hole 0.6: 2(1.27,0) 3(2.54,0)
  silkscreen extent -0.9,-0.9 3.44,0.9
NRF24L01 [mil]
  round 62 hole 35: 1(0,0) 3(0,100) 4(-100,100) 5(0,200) 6(-100,200) 7(0,300) 8(-100,300)
  rect 62x62 hole 35: 2(-100,0)
  silkscreen extent -1065,-59 59,535
NSO8_TP4056 [mm]
  oval 2.2x0.6 smd: 1(-2.908,1.905) 2(-2.908,0.635) 3(-2.908,-0.635) 4(-2.908,-1.905) 5(2.908,-1.905) 6(2.908,-0.635) 7(2.908,0.635) 8(2.908,1.905)
  rect 2.5x5 smd: 9(0,0)
  silkscreen extent -2.52,2.63 -2.27,2.88
NSO16_M [mm] "SOIC, 16-Leads, Body 9.9x3.9mm, Pitch 1.27mm, IPC Low"
  oval 2.5x0.7 smd: 1(-2.45,4.445) 2(-2.45,3.175) 3(-2.45,1.905) 4(-2.45,0.635) 5(-2.45,-0.635) 6(-2.45,-1.905) 7(-2.45,-3.175) 8(-2.45,-4.445) 9(2.45,-4.445) 10(2.45,-3.175) 11(2.45,-1.905) 12(2.45,-0.635) 13(2.45,0.635) 14(2.45,1.905) 15(2.45,3.175) 16(2.45,4.445)
  silkscreen extent -2.57,-5 0.8,5.47, body extent -2,-5 2,5, height 1.75
pot（正方形） [mm]
  round 1.6 hole 0.7: 1(1.905,-1.067) 2(4.445,1.473) 3(1.905,4.013)
  silkscreen extent -0.99,-2.18 6.2,5.21
"RES 0805_1" [mil]
  rect 40x50 smd: 1(0,0) 2(85,0)
  silkscreen extent -32,-38 117,38, body extent 3,-25 82,25, height 30
RESPACK4_SMD [mm]
  rect 0.4x1.174 smd: 1(0,-0.001) 2(0,2.073) 3(0.8,-0.001) 4(0.8,2.073) 5(1.6,-0.001) 6(1.6,2.073) 7(2.4,-0.001) 8(2.4,2.073)
  silkscreen extent -0.45,0.21 2.85,1.86
SOIC8_N [mm] "8-Pin Small Outline Integrated Circuit Package (SOIC8), IPC Medium Den"
  oval 2.2x0.6 smd: 1(-2.4,1.905) 2(-2.4,0.635) 3(-2.4,-0.635) 4(-2.4,-1.905) 5(2.4,-1.905) 6(2.4,-0.635) 7(2.4,0.635) 8(2.4,1.905)
  silkscreen extent -2.52,-2.5 0.9,2.88, body extent -1.95,-2.45 1.95,2.45, height 1.75
SOIC-8 [mil]
  rect 80x24 smd: 1(0,0) 2(0,-50.06) 3(0,-100.06) 4(0,-150.06) 5(270,-150) 6(270,-100) 7(270,-50) 8(270,0)
  silkscreen extent 65,-175 205,25
SOP8 [mil]
  oval 80x24 smd: 1(-115,75) 2(-115,25) 3(-115,-25) 4(-115,-75) 5(105,-75) 6(105,-25) 7(105,25) 8(105,75)
  silkscreen extent -55,-100 45,100, body extent -126,-95 110,97, height 67
SOP16-50-208 [mil]
  rect 75x25 smd: 1(0,0)
  oval 75x25 smd: 2(0,-50) 3(0,-100) 4(0,-150) 5(0,-200) 6(0,-250) 7(0,-300) 8(0,-350) 9(345,-350) 10(345,-300) 11(345,-250) 12(345,-200) 13(345,-150) 14(345,-100) 15(345,-50) 16(345,0)
  silkscreen extent 72,-414 273,64
SOP20 [mm]
  rect 2.2x0.7 smd: 1(0,0)
  oval 2.2x0.7 smd: 2(0,-1.27) 3(0,-2.54) 4(0,-3.81) 5(0,-5.08) 6(0,-6.35) 7(0,-7.62) 8(0,-8.89) 9(0,-10.16) 10(0,-11.43) 11(7.4,-11.43) 12(7.4,-10.16) 13(7.4,-8.89) 14(7.4,-7.62) 15(7.4,-6.35) 16(7.4,-5.08) 17(7.4,-3.81) 18(7.4,-2.54) 19(7.4,-1.27) 20(7.366,0)
  silkscreen extent 0.59,-13 6.81,1.57
SOP-14P [mm]
  rect 2.2x0.6 smd: 1(-2.6,3.81)
  oval 2.2x0.6 smd: 2(-2.6,2.54) 3(-2.6,1.27) 4(-2.6,0) 5(-2.6,-1.27) 6(-2.6,-2.54) 7(-2.6,-3.81) 8(2.6,-3.81) 9(2.6,-2.54) 10(2.6,-1.27) 11(2.6,0) 12(2.6,1.27) 13(2.6,2.54) 14(2.6,3.81)
  silkscreen extent -1.14,-4.42 1.14,4.44
SOT23-6 [mm] "Max4173"
  rect 1.1x0.6 smd: 1(-1.2,0.95) 2(-1.2,0) 3(-1.2,-0.95) 4(1.2,-0.95) 5(1.2,0) 6(1.2,0.95)
  silkscreen extent -1.32,-1.5 0.25,1.92, body extent -0.87,-1.5 0.87,1.5, height 1.45
SOT223 [mm]
  rect 1.1x2.15 smd: 1(-2.808,-3.025) 2(-0.508,-3.025) 3(1.792,-3.025)
  rect 3.5x2.15 smd: 4(-0.508,3.175)
  silkscreen extent -3.86,-1.55 2.84,1.7, body extent -3.78,-3.2 2.72,3.8, height 1.65
SOT-23B_N [mm] "SOT23, 3-Leads, Body 2.9x1.3mm, Pitch 0.95mm, Lead Span 2.4mm, IPC Medium Density"
  rect 1.15x0.6 smd: 1(-1.125,0.95) 2(-1.125,-0.95) 3(1.125,0)
  silkscreen extent -1.25,-1.5 0.7,1.92, body extent -0.7,-1.5 0.7,1.5, height 1.14
SOT-23N [mil]
  rect 36x36 smd: 1(0,0) 3(75,0)
  rect 36x50 smd: 2(38,80)
  silkscreen extent -20,-5 95,85
SOT-23R [mm]
  rect 0.9x0.95 smd: 1(0.95,-1.048) 2(-0.95,-1.048) 3(0,1.302)
  silkscreen extent -2.07,-1.17 1.3,1.3
SW_PB2_A1 [mm]
  rect 2x2.5 smd: 1(0,3.556) 2(0,-3.444)
  silkscreen extent -2,-3.19 2,3.31, body extent -2.03,-3.18 2.03,3.3, height 1.2
SWITCH_B1 [mm]
  rect 1.85x1.85 hole 1.1: 1(-2.54,2.54)
  round 1.85 hole 1.1: 2(-2.54,0) 3(-2.54,-2.54) 4(2.54,-2.54) 5(2.54,0) 6(2.54,2.54)
  silkscreen extent -4.96,-3.81 4.28,3.81
TP6 [mil]
  round 60 smd: 1(0,0)
  silkscreen extent -38,-38 38,38
TP-1.5 [mm]
  round 1.5 smd: 1(0,0)
USB_MICRO [mm] "USB"
  oct 0.4x1.35 smd: 1(-1.3,2.54) 2(-0.65,2.54) 3(0,2.54) 4(0.65,2.54) 5(1.3,2.54)
  rect 2.286x1.9 smd: 6(3.429,0) 7(-3.429,0)
  rect 1.8x1.9 smd: 8(0,0)
  silkscreen extent -2.92,-2.29 2.79,2.67
WS2812 [mm]
  oval 1.5x1 smd: 1(-10,5) 2(-10,2) 3(-5.3,2) 4(-5.3,5)
  silkscreen extent -11.1,1.2 -4.2,5.8
XTAL32 [mil]
  oval 50x40 hole 28: 1(0,0) 2(0,-56)
  rect 92.13x86 smd: ""(220,-27)
  silkscreen extent -28,-77 264,25

## Part data
0 1 B ccw_led cw_led G led1 led2 led3 led4 led5 led6 led7 led8 R. red signA- signB-: "发光二极管"
0.1u 0.1u,,. 0.1u,. 0.1UF, 0.1uf- 0.1uf_, 0.1uf_,, 0.1uf_,,, 0.1uu 0.1uu, 0.3UF 0.8UF 1uf 4.7uf 10nf 10nf_ 10u, 10u,, 10u,,,, 10uu 15P 15P. 22U 22u, 22uf 22UF, 22UF- 22UF-. 104, 104,, 104,,- 104-- 104_-: "Capac"
0.1u, 0.1u,, 0.1u,,, 10u-, 104 104,. 104-, 104-,- 104-,--: library part Cap, "Capacitor"
0.4R 0r_1 0r_2 0r_3 0r_4 1k, 1k_3 1kk 3k 4k 10k 10k, 10k,, 10k,,, 10k,. 10K- 10k-, 10k-,, 10K-- 10k--, 10k_2 10k_3 10kk, 14K 15k 15k_ 47k_0 47k_1 73.2k 90k 100, 100,, 100,,,: "Resi"
0R, 0R,, 0R,,, 0R,,,, 1k_ 1k_, 1k_,, 1k_,. 1k_,ccw 1k_,cw 1ko 4.7K.: "Resistor"
1k 4.7K, 120R, 120R,, 120R,,, 120R,,,, 120R,,,,, 120R,,,,,,: "贴片电阻"
1K-, 1K-,, 1K-,,, 1K--, 1K--,, 1K--,,, 1K---, 1K---,, 1K---,,, 1K----, 1K----,, 1K----,,, 1KK, 1KR 1KR, 3.3K 3.3K, 4.7K 10kk. 10kk.. 10KR 10R 10R, 180 300R 300R.: "Re"
1k_,.. 5R50 6R50 10K-,- 10K_,, 10K_,,, 10K_,,- 10K_,,. 330R: library part Res2, "Resistor"
4.7UH 4.7UH,: "电感"
10K-ADJ 100K-ADJ: "Header"
10uu，: "Capa"
22U. 22U; 47U, 220UF_ 220UF_- 1000UF: "Polarized Capacitor (Radial)"
30pf: "Capacitor"
32.768K: library part XTAL_1
74HC245 74HC573_1 74HC573_2 74HC573_3: library part 74H
74HC595 74HC595_: "移位寄存器"
555 DS1302 L9110_1 L9110_2: "Header, 4-Pin, Dual row"
555方波信号->运放3 升压输出 正弦输出: "Header, 2-Pin"
1117-3.3: library part Component_1
5819 5819, 5819_0 5819_1 5819_3 5819_4 5824_0 5824_0, 5824_2 5824_3: library part "Diode 1N4001", "1 Amp General Purpose Rectifier"
AD/DA: "Header, 5-Pin"
AT24C02: "EEROM存储器"
BAT_3.7V P1.2/ P1.3/ P1.4/ P1.5/ P3.5滤波输出 PWM输出&接入滤波 光敏电阻 硬件复位 速度失能1 速度失能2: "接插件"
CR1220: "Multicell Battery"
DHT11&DS18B20: library part DHT11
Fuse_0.5A Fuse_1A: library part "Fuse 2", "保险丝"
Fuse_3A: library part "Fuse 2"
H桥_OUT: "Header, 2"
IR_ light_SW 积分、放大输入 积分、放大输出 输出波形 运放供电: "Header, 3-Pin"
JoyStick_1: "模拟Ò"
KEY1 KEY2 KEY3 KEY4 KEY5 KEY6 KEY7 KEY8 KEY9 KEY10 RSE: "微动¿"
LG5611AH_1 LG5611AH_2: library part LG5
LM324: library part LM324
MOTO_1 MOTO_2: "Header, 2-"
NPNQ1 QNPN QNPN.: "NPN Bipolar Transistor"
PCF8591: "Header, 8-Pin, Dual row"
Q1 Q2 Q3 Q4 SI2302-, SI2302--, SI2302---, SI2302----, SI2302_1 SI2302_2: library part NMOS-2, "N-Channel Power MOSFET"
S8550 S8550.: library part PNP, "8"
SW-EC11: "旋转编Â"
SX1308 SX1308,: "Header, 3-Pin, Dual row"
TP4056: "锂电池充电管理"
ttp1: library part "Header 3X2", "Header, 3-Pin, Dual row"
USB_M: "MicroUSB接口"
USB供电中: "发¹"
W25Q32: library part W25X16, "W25X16;S"
WS2812: library part BRIDGE2, "Diode Bri"
下载口 蓝牙: "Header, 4-Pin"
供电切换: "单µ"
充满 充电: library part LED0, "发光"
占空比 对比度: library part MHDR1X3, "Hea"
幅度 频率: library part MHDR1X3, "Head"
幅度调节: library part MHDR1X3, "He"
电池供电中 红外发射管: "·"
积分增益调节 运放增益调节: library part MHDR1X3

## Nets (pads, with @x,y where several pads share a name; then routed paths per layer and width w, separated by ;. In a path a pad name is that pad's centre, name@x,y a point inside that pad or via, vN(x,y) a via of type N, cw(c..) or ccw(c..) an arc to the next point about the centre after c; other vN are vias at no path point)
1L9110: 74HC04.1 74HC573_3.14 L9110_1.7
1WIRE_DQ: 4.7K,.1 74HC573_3.16 DHT11&DS18B20.2
2L9110: 74HC04.3 74HC573_3.15 L9110_2.7
6: 0.1u.1 555.2 555.6 频率.1 频率.2
7: 47k_0.2 47k_1.1 555.7 5819_4.2
324_GND: 0r_1.2 0r_2.2 1k_3.1 10k--,.1 10k_2.1 10nf_.1 15k_.1 LM324.11 积分、放大输入.2 积分、放大输出.2
324_POWER: LM324.4 运放供电.2
555_2: 0.1UF,.2 10k-,,.1 14K.2 输出波形.2
555_3: 0.3UF.1 14K.1 输出波形.3
555_GND: 0.1u.2 0.1UF,.1 0.1uf-.1 0.3UF.2 0.8UF.1 0r_3.2 0r_4.2 555.1 幅度.3
555_OUT: 555.3 幅度.1
555_OUT_TO: 10k-,.2 555方波信号->运放3.1 幅度.2 输出波形.1
A: LG5611AH_1.4 LG5611AH_2.4 PACK220R_1.2
A-OUT: AD/DA.5 PCF8591.15 red.2
AIN0: 10K_,,-.1 AD/DA.1 PCF8591.1 光敏电阻.1
AIN1: AD/DA.2 PCF8591.2
AIN2: 10K-ADJ.2 AD/DA.3 PCF8591.3
AIN3: AD/DA.4 PCF8591.4
B: LG5611AH_1.5 LG5611AH_2.5 PACK220R_1.4
BAT+: 0.1uu.1 10uu.1 5824_3.2 TP4056.5 TP4056.8 供电切换.2
BAT_VCC: 4.7UH,.2 22u,.2 1000UF.1 Fuse_3A.1 L9110_1.2 L9110_1.3 L9110_2.2 L9110_2.3 SX1308,.4 SX1308,.5 供电切换.3 电池供电中.1
BELL: 74HC573_2.12 180.2
C: LG5611AH_1.7 LG5611AH_2.7 PACK220R_1.6
CCW: 74HC00.12 74HC04.6
CLOCK: 74HC573_2.18 74HC595.11 74HC595_.11
CW: 74HC00.5 74HC04.5 74HC573_2.13
D: LG5611AH_1.9 LG5611AH_2.9 PACK220R_1.8
D0: 74HC573_1.19 LCD1602.7
D1: 74HC573_1.18 LCD1602.8
D2: 74HC573_1.17 LCD1602.9
D3: 74HC573_1.16 LCD1602.10
D4: 74HC573_1.15 LCD1602.11
D5: 74HC573_1.14 LCD1602.12
D6: 74HC573_1.13 LCD1602.13
D7: 74HC573_1.12 LCD1602.14
DATA: 74HC573_2.17 74HC595.14
E: 74HC573_3.17 LCD1602.6 LG5611AH_1.10 LG5611AH_2.10 PACK220R_2.2
EC11_KEY: 74HC245.18 SW-EC11.4
F: LG5611AH_1.2 LG5611AH_2.2 PACK220R_2.4
G: LG5611AH_1.1 LG5611AH_2.1 PACK220R_2.6
GND: 0.1u,,,.1 0.1u,,.1 0.1u,,..2 0.1u,.1 0.1u,..2 0.1UF,-,.2 0.1uf_,,,.1 0.1uf_,,.2 0.1uf_,.1 0.1uu,.2 0.1uu.2 0.96`OLED.1 0R,,,,.2 0R,,,.2 0R,,.2 0R,.2 0r_1.1 0r_2.1 0r_3.1 0r_4.1 1k.2 1k_,.1 1k_.1 3k.1 10k,..2 10K--.2 10K-.2 10K-ADJ.3 10k.2 10kk..1 10kk...1 10KR.2 10u-,.1 10uu.2 10uu，.2 22u,.1 22U.1 22U..2 22U;.2 22u_1.1 22UF,-.1 22UF,.1 22UF-.1 22UF-..1 22uf.1 30pf.2 47U,.2 74HC00.7 74HC04.7 74HC14.7 74HC74.7 74HC245.10 74HC573_1.1 74HC573_1.10 74HC573_2.1 74HC573_2.10 74HC573_3.1 74HC573_3.8 74HC573_3.9 74HC573_3.10 74HC595.8 74HC595.13 74HC595_.8 74HC595_.13 104,,-.1 104,,.1 104,.1 104,..2 104-,,.2 104-,--.2 104-,-.2 104-,.2 104-,..2 104--.1 104.2 104_-.1 220UF_-.2 220UF_.2 1000UF.2 1117-3.3.1 "BAT -.1" AT24C02.1 AT24C02.2 AT24C02.3 AT24C02.4 AT24C02.7 BAT_3.7V.2 BEEP1.2 CR1220.2 DHT11&DS18B20.3 DHT11&DS18B20.4 DS1302.4 IR_.2 JoyStick_1.1 JoyStick_1.4 JoyStick_1.8 JoyStick_1.10 KEY7.1 KEY8.1 KEY9.1 KEY10.1 L9110_1.5 L9110_1.8 L9110_2.5 L9110_2.8 L.20 LCD1602.1 LCD1602.16 NPNQ1.3 NRF24L01.1 PCF8591.5 PCF8591.6 PCF8591.7 PCF8591.8 PCF8591.12 PCF8591.13 QNPN.3 QNPN..3 SI2302_1.3 SI2302_2.3 SW-EC11.5 SX1308,.2 SX1308.2 TP4056.1 TP4056.3 ttp1.2 ttp1.6 USB_M.5 W25Q32.4 WS2812.3 下载口.2 光敏电阻.2 升压输出.2 对比度.1 正弦输出.2 红外发射管.2 蓝牙.2
H: LG5611AH_1.6 LG5611AH_2.6 PACK220R_2.8
H1: 0.96`OLED.3 74HC245.2 74HC573_1.2 74HC573_2.2 KEY1.2 KEY4.2 L.1 STC15F2K60S2.1
H2: 0.96`OLED.4 74HC245.3 74HC573_1.3 74HC573_2.3 KEY2.2 KEY5.2 L.2 STC15F2K60S2.2
H3: 0.96`OLED.5 74HC245.4 74HC573_1.4 74HC573_2.4 KEY3.2 KEY6.2 L.3 STC15F2K60S2.3
IN1+: 10nf.1 10nf_.2 15k_.2 LM324.3
IN1-: 10k--,.2 LM324.2 幅度调节.2 幅度调节.3
IN3+: 1k_3.2 LM324.10
IN3-: 1uf.1 10kk,.1 LM324.9 积分增益调节.3
IN3_TO: 555方波信号->运放3.2 积分、放大输入.3 积分增益调节.1 积分增益调节.2
IN4+: 10k_3.2 LM324.12
IN4-: 10k_2.2 LM324.13 运放增益调节.1
IN4_TO: 10k_3.1 积分、放大输入.1
INA: 0.1u,..1 10K--.1 74HC14.1 SW-EC11.1
INB: 0.1u,,..1 10K-.1 74HC14.5 SW-EC11.3
IR: 4.7K..1 74HC245.17 IR_.1
IR_OUT: 1KK,.2 74HC245.12
KEY1: 74HC74.6 JoyStick_1.7 JoyStick_1.9 KEY7.2 R.18 signA-.2 STC15F2K60S2.23
KEY2: 74HC74.8 KEY8.2 R.17 signB-.2 STC15F2K60S2.24
KEY3: 74HC245.15 KEY9.2
KEY4: 74HC245.14 KEY10.2
LATCH: 74HC573_2.19 74HC595.12 74HC595_.12
MOT_CCW: 10kk..2 L9110_1.6 速度失能1.2
MOT_CCW_2: 10kk...2 L9110_2.6 速度失能2.1
MOT_GND: 0R,,,,.1 0R,,,.1 0R,,.1 0R,.1 Q3.3 Q4.3
MOT_PWM: 74HC00.4 74HC00.13 74HC573_2.14
MOT_VCC: Fuse_3A.2 Q1.2 Q2.2
MOTO+: 1k_,ccw.1 1ko.1 cw_led.1 H桥_OUT.2 Q1.3 Q3.2
MOTO-: 1k_,cw.1 4.7uf.1 ccw_led.1 H桥_OUT.1 Q2.3 Q4.2
Net0.1uf-_2: 0.1uf-.2 555.5
Net0.1uf_,,_1: 0.1uf_,,.1 330R.2 DS1302.1
Net0.1uu,_1: 0.1uu,.1 0.4R.1 10uu，.1 TP4056.4
Net0.8UF_2: 0.8UF.2 10k-,,.2 10k-,.1
Net0_1: 0.1 1KR.2
Net1_1: 1.1 1KR,.2
Net1k,_1: 1k,.1 signA-.1 signB-.1
Net1K-,,,_2: 1K-,,,.2 P1.2/.2 SI2302-,.2
Net1K-,_2: 1K-,.2 SI2302-,.1
Net1K--,,,_2: 1K--,,,.2 P1.4/.2 SI2302--,.2
Net1K--,_2: 1K--,.2 SI2302--,.1
Net1K---,,,_2: 1K---,,,.2 P1.5/.2 SI2302---,.2
Net1K---,_2: 1K---,.2 SI2302---,.1
Net1K----,,,_2: 1K----,,,.2 P1.3/.2 SI2302----,.2
Net1K----,_2: 1K----,.2 SI2302----,.1
Net1k_1: 1k.1 led1.2 led2.2 led3.2 led4.2 led5.2 led6.2 led7.2 led8.2
Net1k_,,_2: 1k_,,.2 充满.2
Net1k_,.._1: 1k_,...1 red.1
Net1k_,._2: 1k_,..2 充电.2
Net1k_,_2: 1k_,.2 电池供电中.2
Net1k_,ccw_2: 1k_,ccw.2 ccw_led.2
Net1k_,cw_2: 1k_,cw.2 cw_led.2
Net1k__2: 1k_.2 USB供电中.2
Net1KK,_1: 1KK,.1 S8550..2
Net1kk_2: 1kk.2 ttp1.1
Net1ko_2: 1ko.2 4.7uf.2
Net3.3K,_1: 3.3K,.1 3.3K.2 104-,..1
Net3.3K_1: 3.3K.1 PWM输出&接入滤波.1
Net3k_2: 3k.2 TP4056.2
Net4.7UH,_1: 4.7UH,.1 5824_0,.1 SX1308,.1
Net4.7UH_1: 4.7UH.1 5824_0.1 SX1308.1
Net4k_2: 4k.2 幅度调节.1
Net5R50_2: 5R50.2 SI2302_1.1
Net6R50_2: 6R50.2 SI2302_2.1
Net10k,,,_1: 10k,,,.1 10k,,.1 10k,.1 22UF,.2 B.1 G.1 light_SW.3 R..1
Net10k,,,_2: 10k,,,.2 10u,,.1 QNPN..2
Net10k,,_2: 10k,,.2 10u,.1 QNPN.2
Net10k,._1: 10k,..1 15P..1 73.2k.1 SX1308,.3
Net10k,_2: 10k,.2 10u,,,,.1 NPNQ1.2
Net10k_1: 10k.1 15P.1 90k.1 SX1308.3
Net10KR_1: 10KR.1 10UFF.2 300R.2 RSE.1
Net10nf_2: 10nf.2 15k.1
Net10R,_1: 10R,.1 LCD1602.15
Net10R_1: 10R.1 红外发射管.1
Net10R_2: 10R.2 S8550..3
Net10u,,,,_2: 10u,,,,.2 100,,,.2 QNPN..1
Net10u,,_2: 10u,,.2 100,,.2 QNPN.1
Net10u,_2: 10u,.2 100,.2 NPNQ1.1
Net15P._2: 15P..2 22UF-.2 73.2k.2 104--.2 5824_0,.2 Fuse_1A.1
Net30pf_1: 30pf.1 TOUCH.1 ttp1.3
Net32.768K_1: 32.768K.1 DS1302.2
Net32.768K_2: 32.768K.2 DS1302.3
Net47k_1_2: 47k_1.2 5819_3.1
Net74HC00_1: 74HC00.1 74HC00.2 74HC00.6
Net74HC00_3: 74HC00.3 Q2.1 Q3.1
Net74HC00_8: 74HC00.8 Q1.1 Q4.1
Net74HC00_9: 74HC00.9 74HC00.10 74HC00.11
Net74HC04_2: 74HC04.2 速度失能1.1
Net74HC04_4: 74HC04.4 速度失能2.2
Net74HC14_2: 74HC14.2 74HC14.3
Net74HC14_4: 74HC14.4 74HC74.3 74HC74.12 74HC74.13
Net74HC14_6: 74HC14.6 74HC14.9
Net74HC14_8: 74HC14.8 74HC74.1 74HC74.2 74HC74.11
Net74HC595_1: 74HC595.1 PACK220R_1.3
Net74HC595_2: 74HC595.2 PACK220R_1.5
Net74HC595_3: 74HC595.3 PACK220R_1.7
Net74HC595_4: 74HC595.4 PACK220R_2.1
Net74HC595_5: 74HC595.5 PACK220R_2.3
Net74HC595_6: 74HC595.6 PACK220R_2.5
Net74HC595_7: 74HC595.7 PACK220R_2.7
Net74HC595_15: 74HC595.15 PACK220R_1.1
Net74HC595__1: 74HC595_.1 led2.1
Net74HC595__2: 74HC595_.2 led3.1
Net74HC595__3: 74HC595_.3 led4.1
Net74HC595__4: 74HC595_.4 led5.1
Net74HC595__5: 74HC595_.5 led6.1
Net74HC595__6: 74HC595_.6 led7.1
Net74HC595__7: 74HC595_.7 led8.1
Net74HC595__15: 74HC595_.15 led1.1
Net90k_2: 90k.2 100K-ADJ.1
Net100,,,_1: 100,,,.1 B.2
Net100,,_1: 100,,.1 G.2
Net100,_1: 100,.1 R..2
Net120R,,,,,,_1: 120R,,,,,,.1 NRF24L01.8
Net120R,,,,,_1: 120R,,,,,.1 NRF24L01.7
Net120R,,,,_1: 120R,,,,.1 NRF24L01.6
Net120R,,,_1: 120R,,,.1 NRF24L01.5
Net120R,,_1: 120R,,.1 NRF24L01.4
Net120R,_1: 120R,.1 NRF24L01.3
Net180_1: 180.1 S8550.2
Net300R_1: 300R.1 硬件复位.2
Net5819_0_1: 5819_0.1 5819_1.2
Net5819_0_2: 5819_0.2 5819_1.1
Net5819_1: 5819.1 下载口.1
Net5819_3_2: 5819_3.2 占空比.1
Net5819_4_1: 5819_4.1 占空比.3
Net5824_2_2: 5824_2.2 Fuse_0.5A.2
Net5824_3_1: 5824_3.1 "BAT +.1" BAT_3.7V.1
NetBEEP1_1: BEEP1.1 S8550.3
NetCR1220_1: CR1220.1 DS1302.8
NetL9110_1_1: L9110_1.1 MOTO_1.2
NetL9110_1_4: L9110_1.4 MOTO_1.1
NetL9110_2_1: L9110_2.1 MOTO_2.2
NetL9110_2_4: L9110_2.4 MOTO_2.1
NetLCD1602_3: LCD1602.3 对比度.2
NetLG5611AH_1_3: LG5611AH_1.3 LG5611AH_1.8 SI2302_1.2
NetLG5611AH_2_3: LG5611AH_2.3 LG5611AH_2.8 SI2302_2.2
NetTP4056_6: TP4056.6 充满.1
NetTP4056_7: TP4056.7 充电.1
Net占空比_2: 占空比.2 频率.3
OUT1: 4k.1 15k.2 LM324.1 LM324.5
OUT2: LM324.6 LM324.7 正弦输出.1
OUT3: 1uf.2 10kk,.2 LM324.8 积分、放大输出.1
OUT4: LM324.14 积分、放大输出.3 运放增益调节.2 运放增益调节.3
P0.3: 0.96`OLED.6 74HC245.5 74HC573_1.5 74HC573_2.5 KEY1.1 KEY2.1 KEY3.1 L.4 STC15F2K60S2.4
P0.4: 74HC245.6 74HC573_1.6 74HC573_2.6 KEY4.1 KEY5.1 KEY6.1 L.5 STC15F2K60S2.5
P0.5: 74HC245.7 74HC573_1.7 74HC573_2.7 L.6 STC15F2K60S2.6
P0.6: 74HC245.8 74HC573_1.8 74HC573_2.8 L.7 STC15F2K60S2.7
P0.7: 74HC245.9 74HC573_1.9 74HC573_2.9 L.8 STC15F2K60S2.8
P1.0: JoyStick_1.2 L.9 P3.5滤波输出.2 STC15F2K60S2.9 蓝牙.3
"P1.0 ADC0": 3.3K,.2 104-,,.1 P3.5滤波输出.1
P1.1: JoyStick_1.5 L.10 STC15F2K60S2.10 蓝牙.4
P1.2: 74HC573_3.2 L.11 P1.2/.1 STC15F2K60S2.11
P1.3: 74HC573_3.3 L.12 P1.3/.1 STC15F2K60S2.12
P1.4: 74HC573_3.4 L.13 P1.4/.1 STC15F2K60S2.13
P1.5: 74HC573_3.5 L.14 P1.5/.1 STC15F2K60S2.14
P1.6: L.15 STC15F2K60S2.15
P1.7: L.16 STC15F2K60S2.16
P2.0: 120R,.2 R.9 STC15F2K60S2.32
P2.1: 120R,,,.2 R.8 STC15F2K60S2.33
P2.2: 120R,,,,,.2 R.7 STC15F2K60S2.34
P2.3: 120R,,,,.2 R.6 STC15F2K60S2.35
P2.4: 120R,,.2 R.5 STC15F2K60S2.36
P2.5: 120R,,,,,,.2 R.4 STC15F2K60S2.37
P2.6: 10K_,,,.1 AT24C02.5 DS1302.6 PCF8591.9 R.3 STC15F2K60S2.38
P2.7: 10K_,,..1 AT24C02.6 DS1302.7 PCF8591.10 R.2 STC15F2K60S2.39
P3.0: 300R..1 R.20 STC15F2K60S2.21
P3.1: 5819,.1 R.19 STC15F2K60S2.22
P3.4: 10K_,,.2 DS1302.5 R.16 STC15F2K60S2.25
P3.5: PWM输出&接入滤波.2 R.15 STC15F2K60S2.26
P3.6: 74HC573_3.6 R.14 STC15F2K60S2.27
P3.7: 74HC573_3.7 R.13 STC15F2K60S2.28
P4.0/MOSI_3: 1K----,,.2 SI2302----,.3 W25Q32.5
P4.1: 10K-,-.1 74HC245.19 R.12 STC15F2K60S2.29
P4.1/MISO_3: 1K--,,.2 SI2302--,.3 W25Q32.2
P4.2: 74HC245.1 R.11 STC15F2K60S2.30
P4.3/SCLK_3: 1K---,,.2 SI2302---,.3 W25Q32.6
P4.4: 74HC573_1.11 R.10 STC15F2K60S2.31
P4.5: 74HC573_2.11 R.1 STC15F2K60S2.40
P5.4/SS_3: 1K-,,.2 4.7K.1 SI2302-,.3 W25Q32.1
P5.5: 74HC573_3.11 L.19 STC15F2K60S2.19
Q7: 74HC595.9 74HC595_.14
R: 0.2 5819,.2 下载口.4
RS: 74HC573_3.19 LCD1602.4
RST: L.17 STC15F2K60S2.17 硬件复位.1
RW: 74HC573_3.18 LCD1602.5
T: 1.2 300R..2 下载口.3
TTP223: 1kk.1 74HC245.16
UP_OUT: 15P.2 22U.2 47k_0.1 100K-ADJ.2 100K-ADJ.3 104_-.2 220UF_-.1 555.4 555.8 5824_0.2 升压输出.1 运放供电.1
USB_OUT: USB_M.1 供电切换.5
USB_OUT_TO: 5824_2.1 供电切换.4
VCC: 0.1u,,,.2 0.1u,,.2 0.1u,.2 0.1uf_,,,.2 0.1uf_,.2 0.4R.2 1k,.2 1K-,,,.1 1K--,,,.1 1K---,,,.1 1K----,,,.1 1k_,,.1 1k_,..1 1k_,...2 1KR,.1 1KR.1 4.7K..2 4.7UH.2 10K-,-.2 10K-ADJ.1 10K_,,,.2 10K_,,-.2 10K_,,.1 10K_,,..2 10R,.2 10u-,.2 10UFF.1 22U;.1 22u_1.2 22UF,-.2 22UF-..2 22uf.2 47U,.1 74HC00.14 74HC04.14 74HC14.14 74HC74.4 74HC74.10 74HC74.14 74HC245.20 74HC573_1.20 74HC573_2.20 74HC573_3.20 74HC595.10 74HC595.16 74HC595_.10 74HC595_.16 104,,.2 104,.2 104-,--.1 104-,-.1 104-,.1 104.1 220UF_.1 330R.1 1117-3.3.3 5819.2 AT24C02.8 Fuse_0.5A.1 Fuse_1A.2 IR_.3 JoyStick_1.3 JoyStick_1.6 L.18 LCD1602.2 light_SW.2 PCF8591.14 PCF8591.16 RSE.2 S8550.1 S8550..1 STC15F2K60S2.18 SW-EC11.2 SX1308.4 SX1308.5 ttp1.4 ttp1.5 USB供电中.1 WS2812.1 对比度.3 蓝牙.1
VCC_33: 0.1UF,-,.1 0.96`OLED.2 1K-,,.1 1K-,.1 1K--,,.1 1K--,.1 1K---,,.1 1K---,.1 1K----,,.1 1K----,.1 4.7K,.2 4.7K.2 22U..1 104,,-.2 104,..1 1117-3.3.2 DHT11&DS18B20.1 NRF24L01.2 W25Q32.3 W25Q32.7 W25Q32.8
WEI1: 5R50.1 74HC573_2.16
WEI2: 6R50.1 74HC573_2.15
WS2812: 74HC245.13 WS2812.4
pads on no net: 32.768K. 74HC04.8 74HC04.9 74HC04.10 74HC04.11 74HC04.12 74HC04.13 74HC14.10 74HC14.11 74HC14.12 74HC14.13 74HC74.5 74HC74.9 74HC245.11 74HC573_3.12 74HC573_3.13 74HC595_.9 1117-3.3.4 CR1220.0 JoyStick_1.11 JoyStick_1.12 JoyStick_1.13 JoyStick_1.14 light_SW.1 PCF8591.11 STC15F2K60S2.20 SW-EC11.6 SW-EC11.7 SX1308,.6 SX1308.6 TP4056.9 USB_M.2 USB_M.3 USB_M.4 USB_M.6 USB_M.7 USB_M.8 WS2812.2 供电切换.1 供电切换.6 运放供电.3

## Keep-outs
Keep-Out Layer:
  lines w15: 5113.31,4902.35 4916.46,4902.35 4679.46,4665.35 4305.84,4665.35 4227.1,4744.09 3637.33,4744.09 3558.59,4665.35 3184.96,4665.35 2947.96,4902.35 2751.11,4902.35 1968.5,4704.72 1968.5,1377.95 2362.2,984.25 5511.81,984.25 5905.51,1377.95 5905.51,4704.72 5118.11,4901.57

## Other copper
Top Layer:
  text "电子科技创新" at 5441.93,2706.69 h80
  text "实验室" at 5525.59,2642.72 h80
Bottom Layer:
  rectangle: 5436.93,2693.34 5805.95,2762.3
  rectangle: 5522.64,2633.86 5708.58,2698.33

## Silkscreen, mask and mechanical layers (free items; w line width, h text height)
Top Overlay:
  text "+" at 2015.75,4436.02 h78.74
  text "红外接收管" at 2042.32,4421.26 h40
  text "+" at 2315.94,4333.66 h78.74
  text "GND" at 2245.08,4086.61 h40
  text "DATA" at 2245.08,3982.46 h40
  text "V3.3" at 2245.08,3878.94 h40
  text "+" at 2164.37,3247.05 h78.74
  text "V G T R" at 3625.98,3242.13 h62.99
  text "V G T R" at 4220.47,3242.13 h62.99
  text "覆铜后记得把背面铜块删掉" at 5935.04,2527.56 h40
  text "+" at 3419.29,2001.97 h78.74
  text "DA/4-AD" at 4375.98,1708.66 h40
Bottom Overlay:
  text "V3.3" at 3119.09,4666.34 h40
Top Solder:
  rectangle: 5436.93,2693.34 5805.95,2762.3
  rectangle: 5522.64,2633.86 5708.58,2698.33